# Altium PCB inverter_board.PcbDoc
Units mm, origin at the board's own origin, x right, y up, seen from the top; angles counter-clockwise.
Board outline 40 x 30 mm, 2 copper layers (Top Layer, Bottom Layer); 5 components, 8 nets, 19 pads, 0 vias.
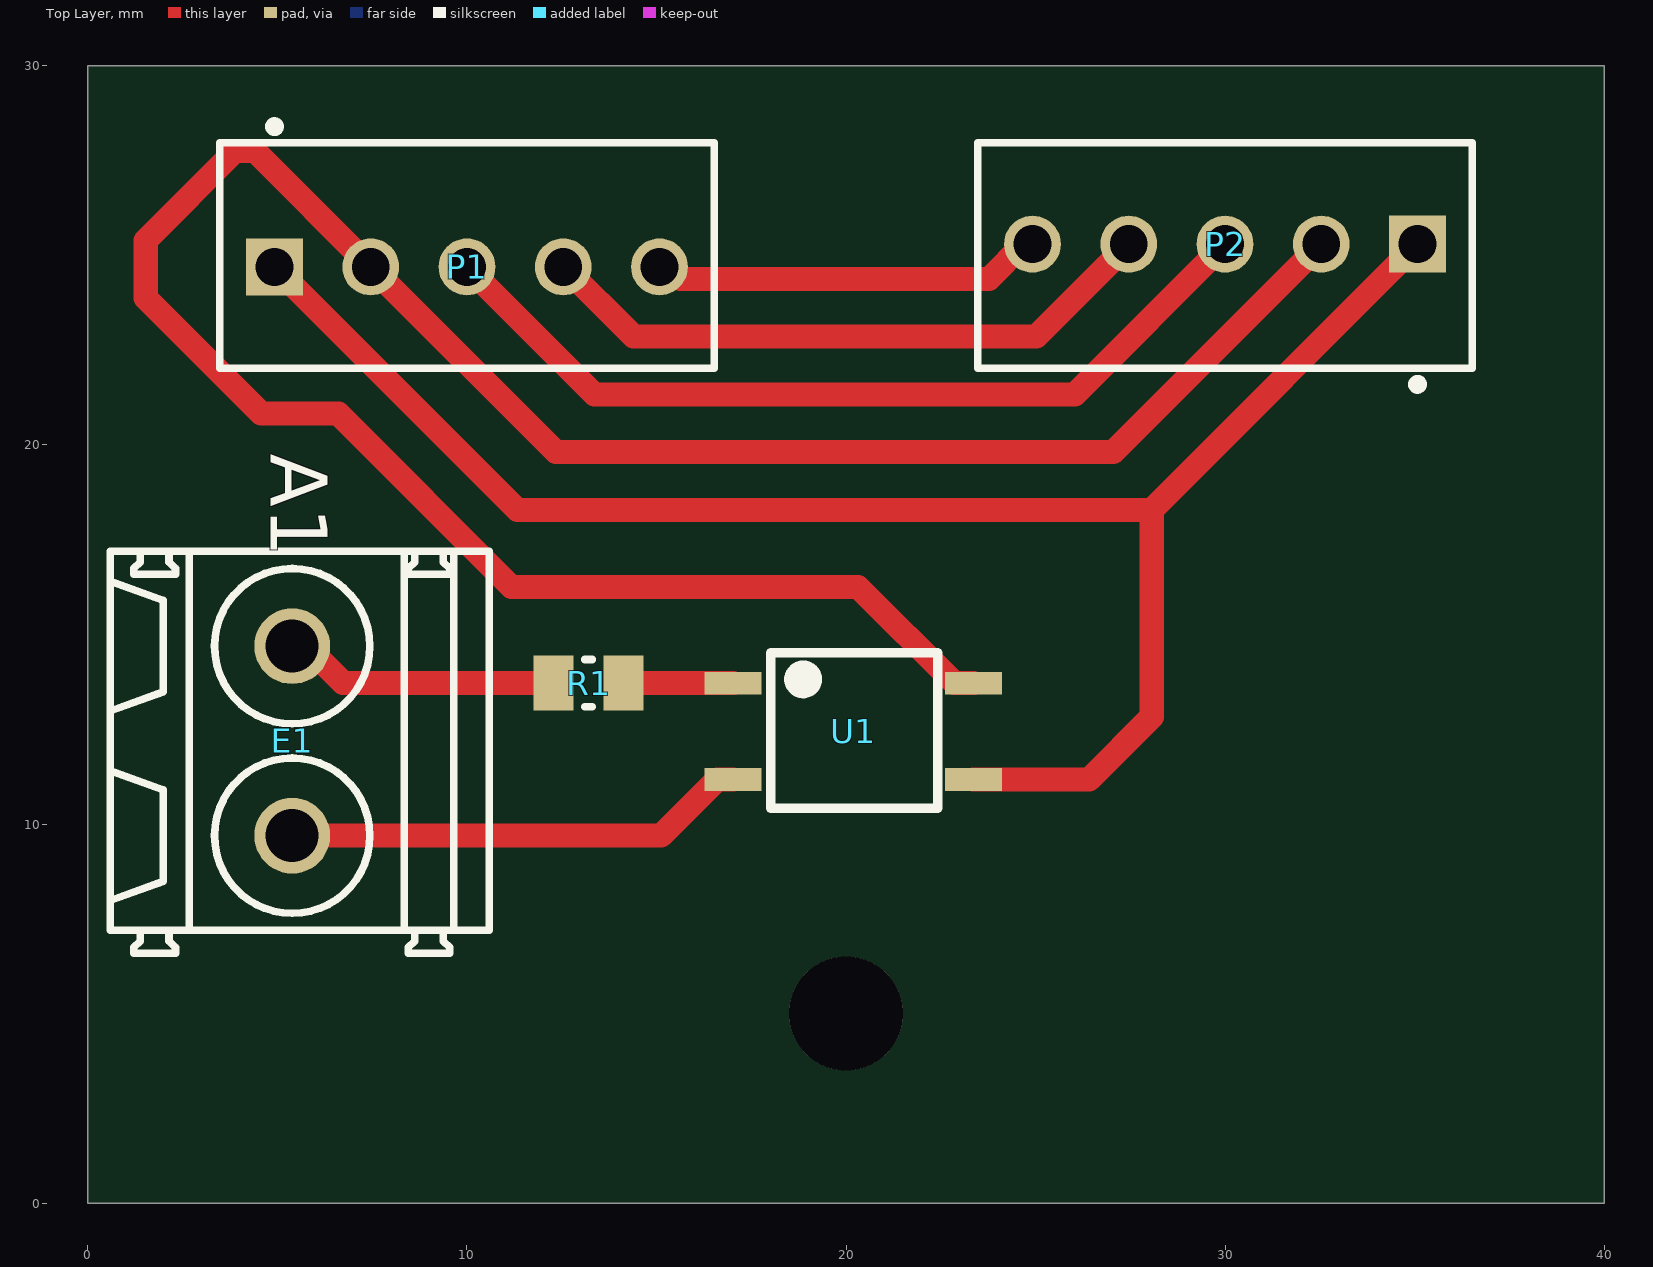
[diagram p0: Top Layer view]
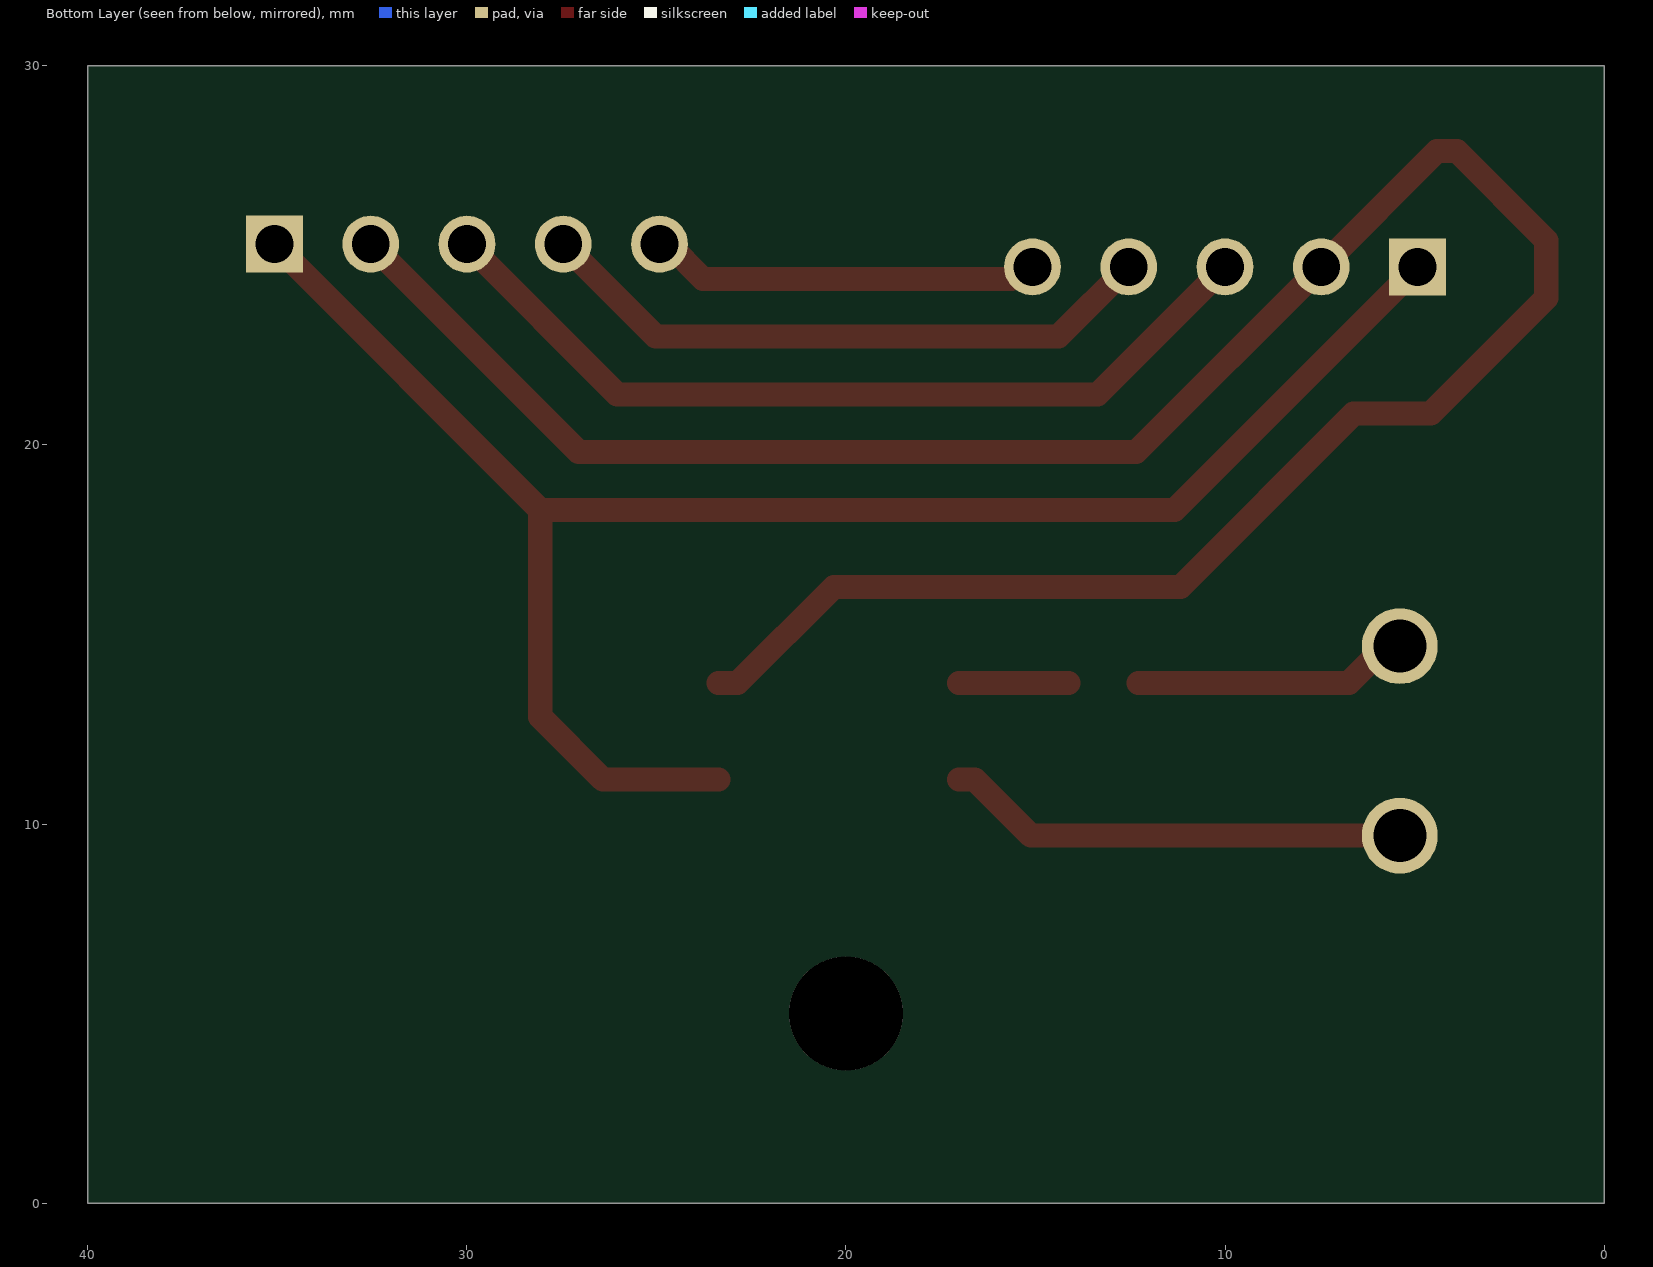
[diagram p1: Bottom Layer view, seen from below]
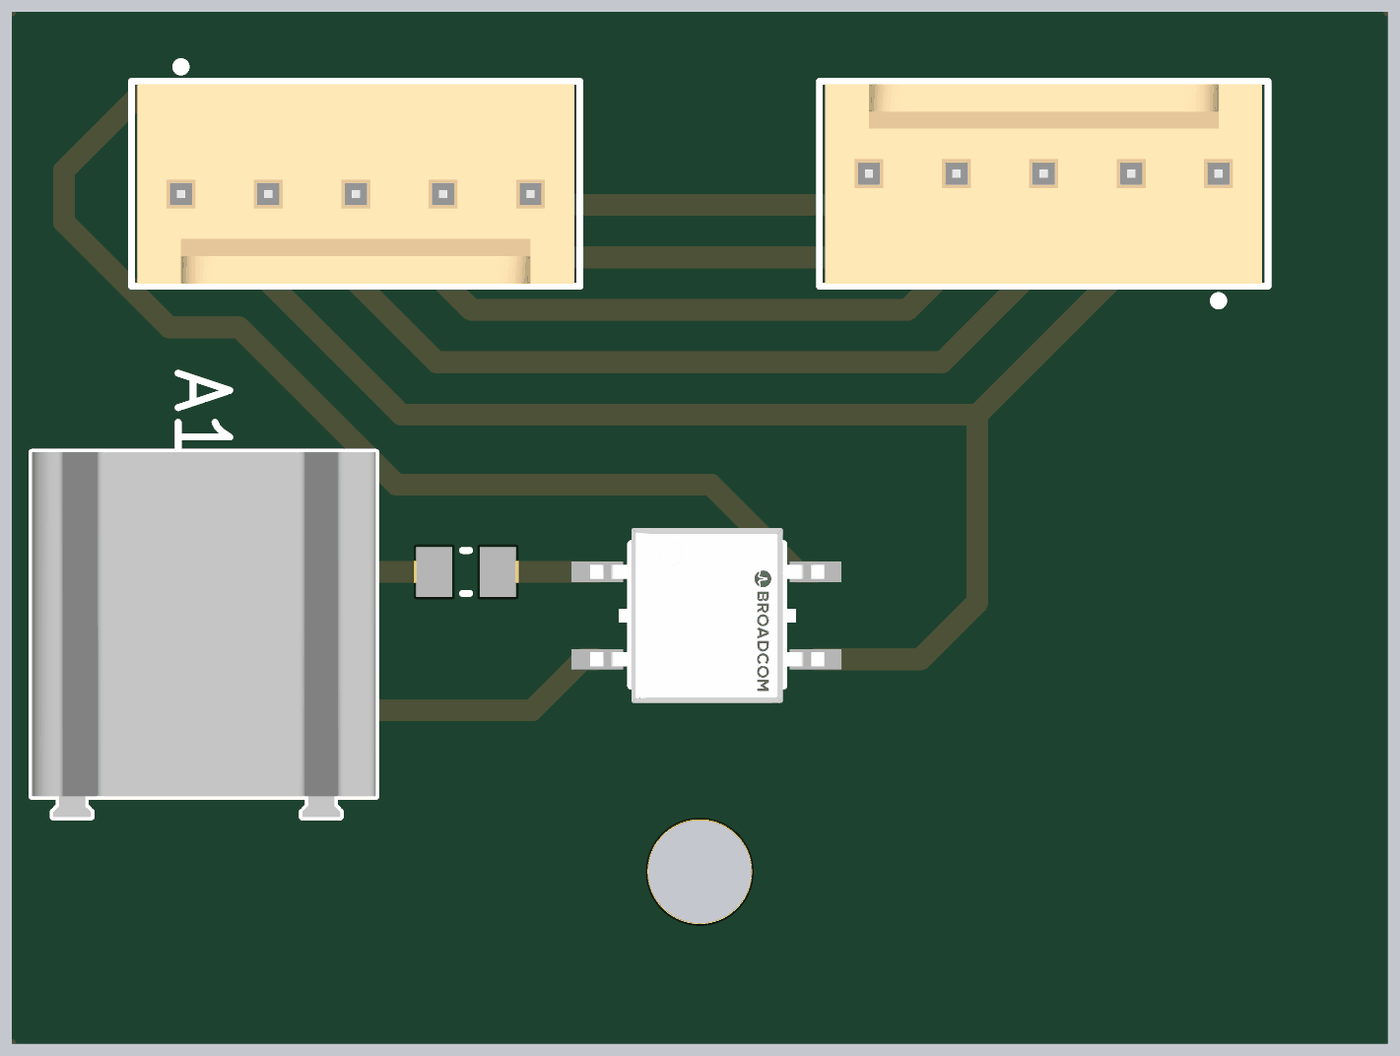
[diagram p2: 3D render of the assembled board from above, using the file's embedded part models]

## Layer stack, top to bottom
Top Solder: solder mask 0.0102, Solder Resist, Dk 3.5
Top Layer: signal copper 0.0356
Dielectric 1: dielectric 0.32, FR-4, Dk 4.8
Bottom Layer: signal copper 0.0356
Bottom Solder: solder mask 0.0102, Solder Resist, Dk 3.5

## Board outline
0,0 40,0 40,30 0,30

## Design rules (kind name [scope] priority, off if disabled: settings)
BoardOutlineClearance [All] p1: gap=0.2 ignorepadtopadclearanceinfootprint=FALSE
Clearance [All] p1: gap=0.127 ignorepadtopadclearanceinfootprint=FALSE except(0.25: Arc-Hole Track-Hole SMDPad-Hole THPad-Hole Via-Hole Fill-Hole Poly-Hole Region-Hole Text-Hole)
ComponentClearance [All] p1: gap=0.127 collisioncheckmode=3 verticalgap=0.127 showdistances=TRUE
DiffPairsRouting [All] p1: maxlimit=0.254 minlimit=0.127 mostfreqgap=0.127 toplayer_minwidth=0.127 toplayer_maxwidth=25.4 toplayer_prefwidth=0.127 bottomlayer_minwidth=0.127 bottomlayer_maxwidth=25.4 bottomlayer_prefwidth=0.127 maxuncoupledlength=12.7
Height [All] p1: minheight=0 maxheight=1816.048 prefheight=12.7
HoleSize [All] p1: absolutevalues=TRUE maxlimit=6.3 minlimit=0.3 maxpercent=80.000 minpercent=20.000
HoleToHoleClearance [All] p1: gap=0.25 allowstackedmicrovias=FALSE
MinimumAnnularRing [All] p1: minimumring=0.076
MinimumSolderMaskSliver [All] p1: minsoldermaskwidth=0
PlaneClearance [All] p1: clearance=0.127
PlaneConnect PlaneConnectPowerPads [InPadClass('PowerPads')] p1: planeconnectstyle=Direct reliefexpansion=0.508 reliefentries=4 reliefconductorwidth=0.254 reliefairgap=0.254
PlaneConnect [All] p2: pad.planeconnectstyle=Relief pad.reliefexpansion=0.3 pad.reliefentries=4 pad.reliefconductorwidth=0.127 pad.reliefairgap=0.127 via.planeconnectstyle=Direct via.reliefexpansion=0.3 via.reliefentries=4 via.reliefconductorwidth=0.127 via.reliefairgap=0.127
PolygonConnect PolygonConnectPowerPads [All vs (InPadClass('PowerPads'))] p1: connectstyle=Direct reliefconductorwidth=0.254 reliefentries=4 polygonreliefangle="90 Angle" airgapwidth=0.254
PolygonConnect [All] p2: thpad.connectstyle=Relief thpad.reliefconductorwidth=0.508 thpad.reliefentries=4 thpad.polygonreliefangle="90 Angle" thpad.airgapwidth=0.127 smdpad.connectstyle=Relief smdpad.reliefconductorwidth=0.508 smdpad.reliefentries=4 smdpad.polygonreliefangle="90 Angle" smdpad.airgapwidth=0.127 via.connectstyle=Direct via.reliefconductorwidth=0.127 via.reliefentries=4 via.polygonreliefangle="90 Angle" via.airgapwidth=0.127
RoutingVias [All] p1: holewidth=0.3 width=0.6 viastyle="Through Hole" minholewidth=0.3 minwidth=0.6 maxholewidth=0.6 maxwidth=6.6
SilkToSilkClearance [All] p1: silktosilkclearance=0
SilkToSolderMaskClearance [IsPad] p1: minsilkscreentomaskgap=0.127 clearancetoexposedcopper=TRUE
SolderMaskExpansion [All] p1: expansion=0.075 istentingtop=FALSE
Width [All] p1: maxlimit=0.635 minlimit=0.127 preferedwidth=0.635
20 further rules are at their usual default settings.

## Classes and differential pairs
component class inverter_board: E1 P1 R1 U1

## Components (designator, comment, footprint, x,y, rotation, side; value= is the part's Value field where it differs from the comment)
E1 "1715310000" LM_5_00_90_02 5.588,12.192 r270 top
P1 "61900511121" 61900511121 10,25 r180 top
P2 "61900511121" 61900511121 30,25 r0 top
R1 "2kΩ" RES_0805 13.208,13.716 r0 top
U1 "EL357N-G" SOP-4_4mm 17.018,13.716 r0 top

## Footprints (in the part's own frame and the unit in brackets; to place one, negate y for a bottom-side part, rotate by r counter-clockwise, add the part's x,y. Pads: shape width x height; smd on the part's side, far side on the other; paste and mask are expansions set on the pad)
61900511121 [mm] "2.54mm Male Locking Header, 5p"
  rect 1.5x1.5 hole 1: 1(5.08,0.3)
  round 1.5 hole 1: 2(2.54,0.3) 3(0,0.3) 4(-2.54,0.3) 5(-5.08,0.3)
  silkscreen extent -6.52,-3.52 6.52,2.98, body extent -6.35,-2.9 6.35,2.9, height 11.53
LM_5_00_90_02 [mm] "OMNIMATE Signal - Serie LM  LM 5.00/02/90 3.5"
  round 2 hole 1.4: A1(-2.5,-0.2) A2(2.5,-0.2)
  silkscreen extent -5,-5 5.6,5, body extent -5,-5 5.6,5, height 13.81
RES_0805 [mm] "Chip Resistor, 2-Leads, Body 2.00x1.25mm, IPC Medium Density"
  rect 1.05x1.45 smd: 1(-0.925,0) 2(0.925,0)
  silkscreen extent -0.1,-0.63 0.1,0.63, body extent -1.1,-0.72 1.1,0.72, height 0.5
SOP-4_4mm [mm]
  rect 1.5x0.6 smd paste+0 mask+0: 1(0,0) 2(0,-2.54) 3(6.35,-2.54) 4(6.35,0)
  silkscreen extent 1,-3.3 5.4,0.8, body extent -0.5,-3.62 6.9,1.08, height 0.25

## Part data
E1: library part CMP-1559-01745-1, "OMNIMATE Signal - series LM", Colour=Orange, Manufacturer=Weidmueller, Rated_current_use_group_B_UL_1059="15 A", Rated_voltage_for_surge_voltage_class_pollution_degree_II_2="630 V", Rated_voltage_use_group_B_UL_1059="300 V", UL_94_flammability_rating=V-0, ComponentLink1Description="Manufacturer URL", ComponentLink1URL=http://www.weidmueller.com/, ComponentLink2Description="URL Link1", ComponentLink2URL=http://catalog.weidmueller.com/catalog/Start.do?localeId=en&ObjectID=1715310000, Contact_material=Cu-Leg, Contact_surface=tinned, Insulating_material="Wemid (PA)", Mounting_onto_the_PCB="Solder connection", No_of_poles=2, PackageReference=LM_5_00_90_02, Packaging=Box, PartNumber=1715310000, Pitch_inch="0,197 inch", Pitch_mm="5 mm", Qty="500 PCS", Revision=V1, Short_text_for_material="LM 5.00/02/90 3.5SN OR BX", Side_termination_characteristic="closed side", Solder_pin_length_mm="3,5 mm", Solid_max_H05_07_V_U="2,5 mm²", Solid_min_H05_07_V_U="0,2 mm²", Wire_cross_section_AWG_max_UL_1059="AWG 14", Wire_cross_section_AWG_min_UL_1059="AWG 24"
P1 P2: library part CMP-1502-00587-1, "Male Locking Header WR-WTB, THT, Vertical, pitch 2.54 mm, 1 x 5 position", Contact Resistance=20mOhm, Manufacturer="Wurth Elektronik", Operating Temperature=-40to105degC, Working Voltage=250VAC, Datasheet URL=https://katalog.we-online.de/em/datasheet/6190xx11121.pdf, Gender=Male, Manufacturer URL=http://www.we-online.de, Mounting Technology=THT, Orientation=Vertical, Package Reference=61900511121, Packaging=Bag, Part Number=61900511121, Pitch=2.54mm, Position=1x5, Publisher=WurthElektronik
R1: library part RES_100kohm_0805, "Res Thick Film 0805 100K Ohm 1% 0.125W(1/8W) ±100ppm/°C Molded SMD Punched Carrier T/R", Case Code (Imperial)=0805, Case Code (Metric)=2012, Manufacturer=Panasonic, Manufacturer Part Number=ERJ-6ENF1003V, Max Operating Temperature=155°C, Max Power Dissipation=125mW, Min Operating Temperature=-55°C, Package Quantity=1, Resistance=100kR, Resistor Type="Thick Film", Supplier Part Number 1=667-ERJ-6ENF1003V, Temperature Coefficient=100ppm/°C, Tolerance=1%, Voltage Rating=150V, Case/Package=0805, Category="Chip SMD Resistors", ComponentLink1Description=https://datasheet.ciiva.com/11821/0900766b80f80784-11821507.pdf?src-supplier=RSComponents, ComponentLink1URL=https://datasheet.ciiva.com/11821/0900766b80f80784-11821507.pdf?src-supplier=RSComponents, ComponentLink2Description=https://datasheet.ciiva.com/22723/426256-22723909.pdf?src-supplier=Element14, ComponentLink2URL=https://datasheet.ciiva.com/22723/426256-22723909.pdf?src-supplier=Element14, ComponentLink3Description=https://datasheet.ciiva.com/46419/1678782-46419877.pdf?src-supplier=Element14, ComponentLink3URL=https://datasheet.ciiva.com/46419/1678782-46419877.pdf?src-supplier=Element14, ComponentLink4Description=https://datasheet.ciiva.com/27055/1988989-27055734.pdf?src-supplier=Jameco, ComponentLink4URL=https://datasheet.ciiva.com/27055/1988989-27055734.pdf?src-supplier=Jameco, ComponentLink5Description=https://datasheet.ciiva.com/16449/aoa0000ce2-16449480.pdf?src-supplier=Future+Electronics, ComponentLink5URL=https://datasheet.ciiva.com/16449/aoa0000ce2-16449480.pdf?src-supplier=Future+Electronics, ComponentLink6Description=https://datasheet.ciiva.com/17208/aoa0000ce2-17208153.pdf?src-supplier=Avnet+Europe, ComponentLink6URL=https://datasheet.ciiva.com/17208/aoa0000ce2-17208153.pdf?src-supplier=Avnet+Europe, ComponentLink7Description=https://datasheet.ciiva.com/22667/1678782-22667897.pdf?src-supplier=Element14, ComponentLink7URL=https://datasheet.ciiva.com/22667/1678782-22667897.pdf?src-supplier=Element14, ComponentLink8Description=https://datasheet.ciiva.com/24023/aoa0000ce2-24023497.pdf?src-supplier=Mouser, ComponentLink8URL=https://datasheet.ciiva.com/24023/aoa0000ce2-24023497.pdf?src-supplier=Mouser, ComponentLink9Description=https://datasheet.ciiva.com/7830/426256-7830746.pdf?src-supplier=Element14, ComponentLink9URL=https://datasheet.ciiva.com/7830/426256-7830746.pdf?src-supplier=Element14, ComponentLink10Description=https://datasheet.ciiva.com/30257/aoa0000ce2-30257690.pdf?src-supplier=Onlinecomponents.com, ComponentLink10URL=https://datasheet.ciiva.com/30257/aoa0000ce2-30257690.pdf?src-supplier=Onlinecomponents.com, ComponentLink11Description=https://datasheet.ciiva.com/7830/426256-7830988.pdf?src-supplier=Element14, ComponentLink11URL=https://datasheet.ciiva.com/7830/426256-7830988.pdf?src-supplier=Element14, ComponentLink12Description=https://datasheet.ciiva.com/16776/70260748-16776892.pdf?src-supplier=Allied+Electronics, ComponentLink12URL=https://datasheet.ciiva.com/16776/70260748-16776892.pdf?src-supplier=Allied+Electronics, ComponentLink13Description=https://datasheet.ciiva.com/16788/70260748-16788734.pdf?src-supplier=Allied+Electronics, ComponentLink13URL=https://datasheet.ciiva.com/16788/70260748-16788734.pdf?src-supplier=Allied+Electronics, ComponentLink14Description=https://datasheet.ciiva.com/48531/aoa0000ce2-48531486.pdf?src-supplier=Avnet, ComponentLink14URL=https://datasheet.ciiva.com/48531/aoa0000ce2-48531486.pdf?src-supplier=Avnet, Contact Plating=Tin, Depth=1.25mm, Features="Automotive AEC-Q200", Height=0.6mm, Lead Free="Lead Free", Length=2mm, Military Standard=Not, Mount="Surface Mount", Number of Pins=2, Number of Terminations=2, Packaging="Tape and Reel", Power Rating=125mW, Pricing 1="1=0.11000, 10=0.08300, 50=0.08300, 100=0.03200, 1000=0.01400, 2500=0.01300, 5000=0.01000, 10000=0.01000 (USD)", Radiation Hardening=No, REACH SVHC="No SVHC", RoHS=Yes, Stock 1=3449, Supplier 1=Mouser, Termination=SMD/SMT, Voltage Rating (DC)=150V, Width=0.049inch
U1: library part OPTOCOUPLER_EL357N-G, "4 PIN SOP PHOTOTRANSISTOR PHOTOCOUPLER / CTR: 50~600% at IF =5mA, VCE =5V / 4 Pin SOP with a 2.0 mm profile", ComponentLink1Description=Datasheet, ComponentLink1URL=https://www.mouser.com/datasheet/2/143/201407061738295695-365680.pdf

## Free pads (board coordinates)
  round 3 hole 3: ""(20,5)

## Nets (pads, with @x,y where several pads share a name; then routed paths per layer and width w, separated by ;. In a path a pad name is that pad's centre, name@x,y a point inside that pad or via, vN(x,y) a via of type N, cw(c..) or ccw(c..) an arc to the next point about the centre after c; other vN are vias at no path point)
NetE1_A1: E1.A1 R1.1 | length 7.3
  Top Layer w0.635: E1.A1 5.757,14.692 6.733,13.716 R1.1
NetE1_A2: E1.A2 U1.2 | length 12.2
  Top Layer w0.635: E1.A2 15.119,9.692 16.603,11.176 U1.2
NetP1_1: P1.1 P2.1 U1.3 | length 46.6
  Top Layer w0.635: P1.1 11.332,18.288 28.068,18.288 ; U1.3 26.416,11.176 28.068,12.828 28.068,18.288 ; P2.1 28.068,18.288
NetP1_2: P1.2 P2.2 U1.4 | length 65.1
  Top Layer w0.635: U1.4 22.86,13.716 20.32,16.256 11.176,16.256 6.604,20.828 4.572,20.828 1.524,23.876 1.524,25.4 3.879,27.755 4.405,27.755 P1.2 12.348,19.812 27.052,19.812 P2.2
NetP1_3: P1.3 P2.3 | length 23
  Top Layer w0.635: P1.3 13.364,21.336 26.036,21.336 P2.3
NetP1_4: P1.4 P2.4 | length 16.7
  Top Layer w0.635: P1.4 12.559,24.7 14.399,22.86 25.02,22.86 P2.4
NetP1_5: P1.5 P2.5 | length 10.4
  Top Layer w0.635: P1.5 15.314,24.7 15.63,24.384 23.77,24.384 24.686,25.3 P2.5
NetR1_2: R1.2 U1.1 | length 2.9
  Top Layer w0.635: R1.2 U1.1

## Silkscreen, mask and mechanical layers (free items; w line width, h text height)
Mechanical 1:
  the board outline again, w0.254

## Dimensions
0,30 to -1,0 on Top Layer
0,30 to 40,30 on Top Layer

## Text inside footprints (layer, text, board x,y; h text height)
E1: Top Overlay "A1" at 4.827,19.767 h1.5 r270